# EAGLE board working (EAGLE 7.7.0)
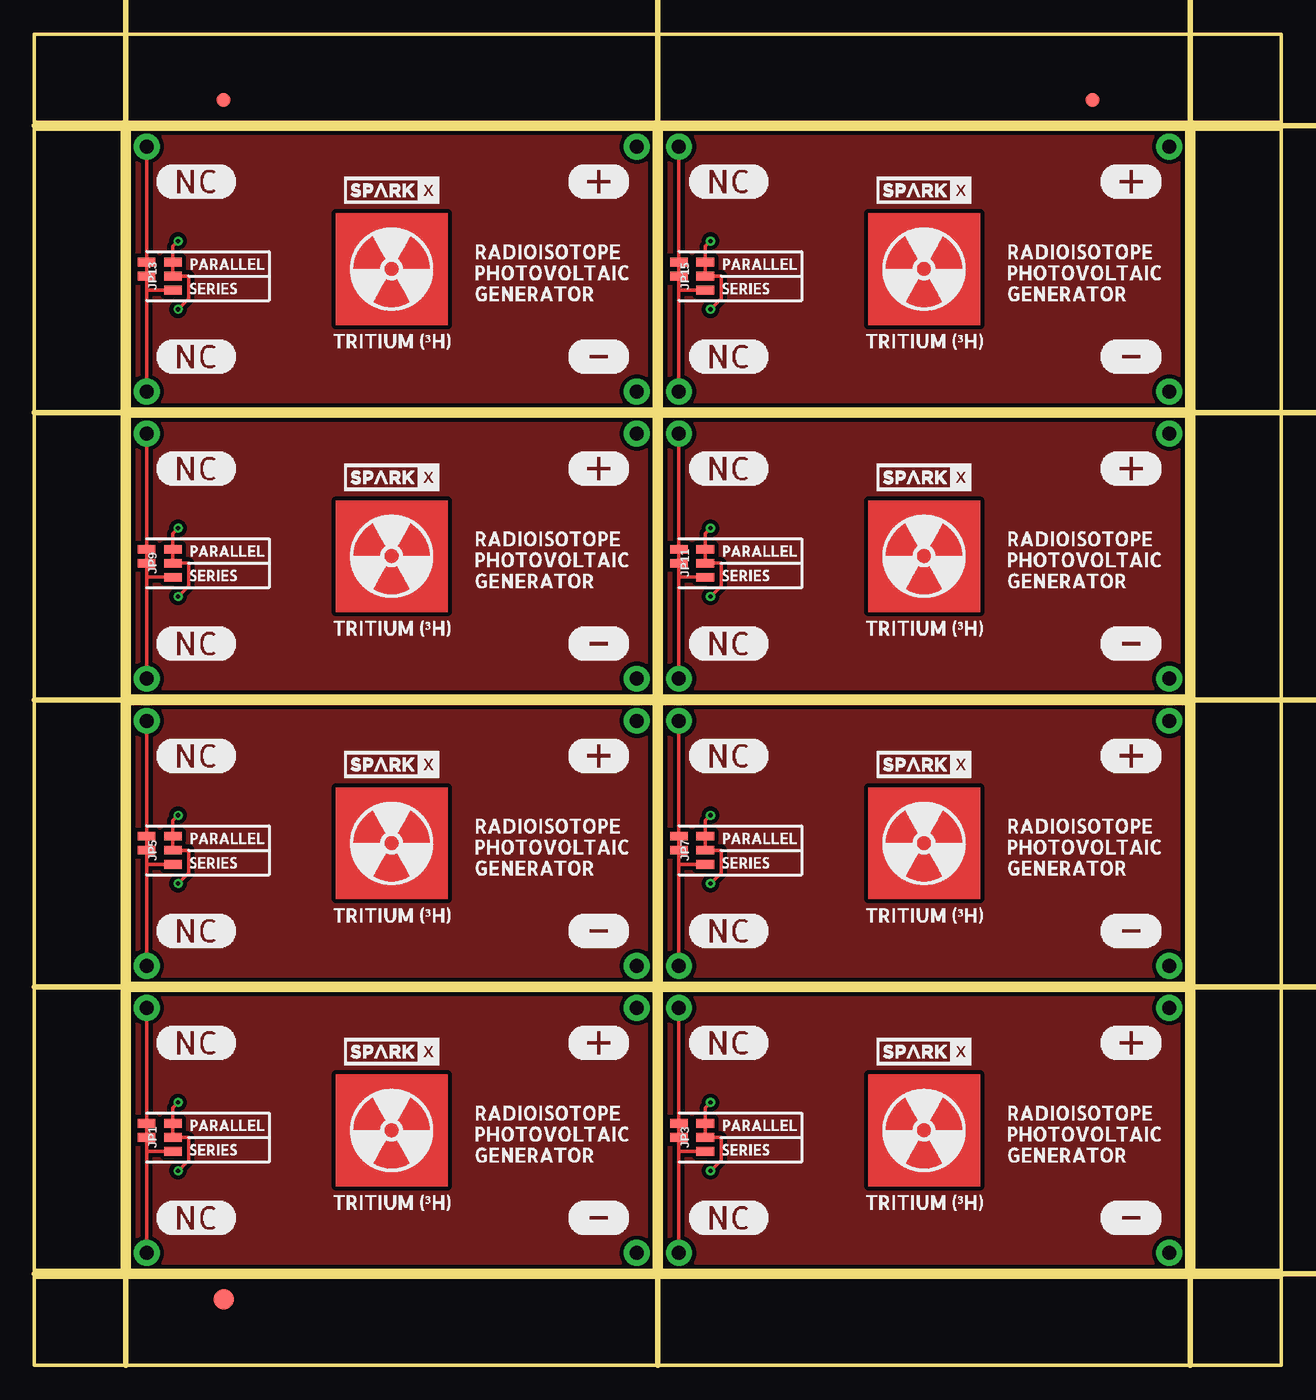
[diagram p0: board, top side]
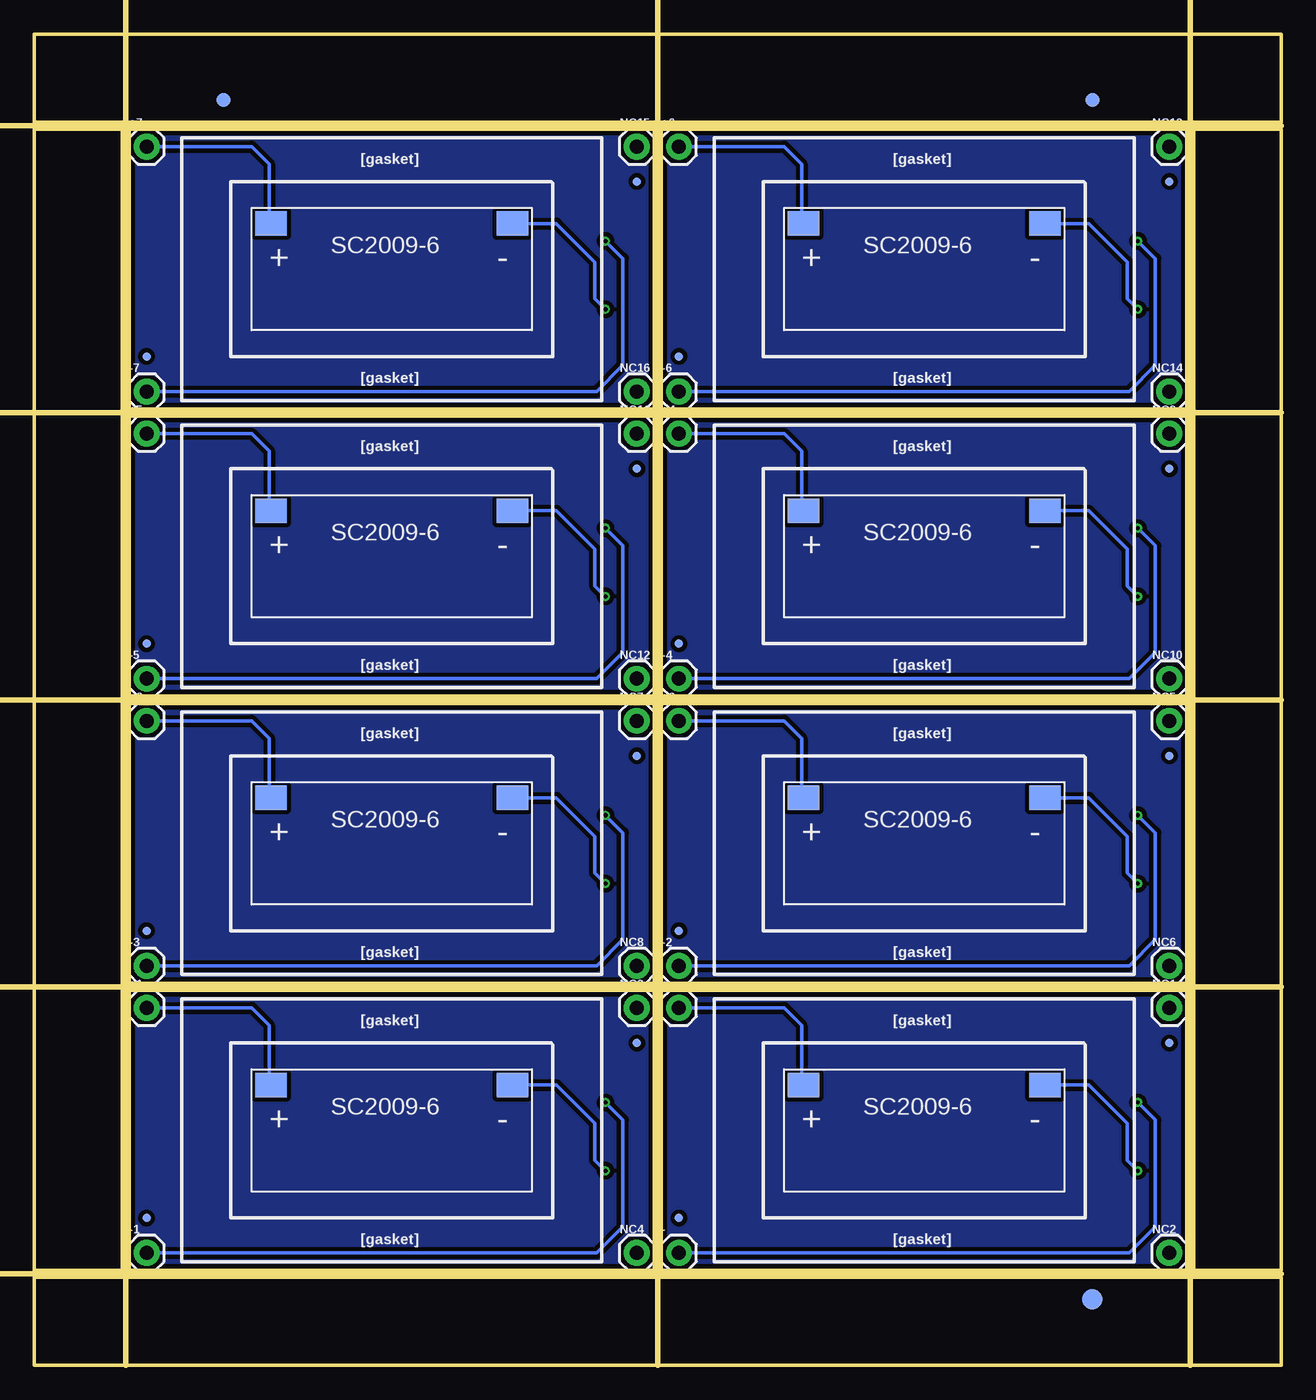
[diagram p1: board, bottom side, seen from below]

Size 90.42 x 96.52 mm. Coordinates in mm from the lower left corner, seen from the top.
Outline: 44.96,27.18 6.86,27.18 6.86,6.86 44.96,6.86 44.96,27.18
Outline: 83.57,27.18 45.47,27.18 45.47,6.86 83.57,6.86 83.57,27.18
Outline: 44.96,48.01 6.86,48.01 6.86,27.69 44.96,27.69 44.96,48.01
Outline: 83.57,48.01 45.47,48.01 45.47,27.69 83.57,27.69 83.57,48.01
Outline: 44.96,68.83 6.86,68.83 6.86,48.51 44.96,48.51 44.96,68.83
Outline: 83.57,68.83 45.47,68.83 45.47,48.51 83.57,48.51 83.57,68.83
Outline: 44.96,89.66 6.86,89.66 6.86,69.34 44.96,69.34 44.96,89.66
Outline: 83.57,89.66 45.47,89.66 45.47,69.34 83.57,69.34 83.57,89.66
Outline: 0,6.35 90.42,6.35 90.42,0 0,0 0,6.35
Outline: 84.07,89.66 90.42,89.66 90.42,6.86 84.07,6.86 84.07,89.66
Outline: 0,96.52 90.42,96.52 90.42,90.17 0,90.17 0,96.52
Outline: 0,89.66 6.35,89.66 6.35,6.86 0,6.86 0,89.66
Copper layers (1*16): Top 0.035mm / dielectric 1.5mm / Bottom 0.035mm
Design rules "SparkFun-2-layer-PCBWay-LIMIT": minimum track width 6mil, minimum drill 0.3mm, track to track 6mil, track to pad 6mil, pad to pad 6mil, via to via 6mil, smd to smd 6mil, copper to edge 6mil, drill to drill 6mil, minimum pad ring 7mil, minimum via ring 7mil, stop-mask expansion 4mil, vias tented up to drill 25mil, thermal gap 10mil
Milling: 8 lines

## Footprints (pad centres in the part's own frame; a part is rotated, then mirrored left to right if it is on the bottom)
1X01 = drill 1.016 pad 1.88: 1 0,0
FIDUCIAL-1X2 = smd 1 x 1: 1 0,0
FIDUCIAL-1.5X3 = smd 1.5 x 1.5: 1 0,0
FIDUCIAL-MICRO = smd 0.635 x 0.635: 1 0,0
SMT-JUMPER_3_1-NC_TRACE_NO-SILK = smd 0.635 x 1.27: 1 -1.016,0; 2 0,0; 3 1.016,0
SMT-JUMPER_2_NC_TRACE_NO-SILK = smd 0.635 x 1.27: 1 -0.508,0; 2 0.508,0
20X9MM = smd 2.286 x 1.778: + -8.763,3.302; - 8.763,3.302

## Placement (x,y rotation side)
+  [1X01]  43.69,25.91 0 bottom
+1  [1X01]  82.3,25.91 0 bottom
+2  [1X01]  43.69,46.74 0 bottom
+3  [1X01]  82.3,46.74 0 bottom
+4  [1X01]  43.69,67.56 0 bottom
+5  [1X01]  82.3,67.56 0 bottom
+6  [1X01]  43.69,88.39 0 bottom
+7  [1X01]  82.3,88.39 0 bottom
-  [1X01]  43.69,8.13 0 bottom
-1  [1X01]  82.3,8.13 0 bottom
-2  [1X01]  43.69,28.96 0 bottom
-3  [1X01]  82.3,28.96 0 bottom
-4  [1X01]  43.69,49.78 0 bottom
-5  [1X01]  82.3,49.78 0 bottom
-6  [1X01]  43.69,70.61 0 bottom
-7  [1X01]  82.3,70.61 0 bottom
E$1  [FIDUCIAL-1X2]  13.72,91.76 0 top
E$2  [FIDUCIAL-1X2]  13.72,91.76 0 bottom
E$3  [FIDUCIAL-1X2]  76.71,91.76 0 top
E$4  [FIDUCIAL-1X2]  76.71,91.76 0 bottom
E$5  [FIDUCIAL-1.5X3]  13.72,4.76 0 top
E$6  [FIDUCIAL-1.5X3]  13.72,4.76 0 bottom
FD1  FIDUCIALUFIDUCIAL  [FIDUCIAL-MICRO]  43.69,10.67 0 bottom
FD2  FIDUCIALUFIDUCIAL  [FIDUCIAL-MICRO]  8.13,23.37 0 bottom
FD3  FIDUCIALUFIDUCIAL  [FIDUCIAL-MICRO]  82.3,10.67 0 bottom
FD4  FIDUCIALUFIDUCIAL  [FIDUCIAL-MICRO]  46.74,23.37 0 bottom
FD5  FIDUCIALUFIDUCIAL  [FIDUCIAL-MICRO]  43.69,31.5 0 bottom
FD6  FIDUCIALUFIDUCIAL  [FIDUCIAL-MICRO]  8.13,44.2 0 bottom
FD7  FIDUCIALUFIDUCIAL  [FIDUCIAL-MICRO]  82.3,31.5 0 bottom
FD8  FIDUCIALUFIDUCIAL  [FIDUCIAL-MICRO]  46.74,44.2 0 bottom
FD9  FIDUCIALUFIDUCIAL  [FIDUCIAL-MICRO]  43.69,52.32 0 bottom
FD10  FIDUCIALUFIDUCIAL  [FIDUCIAL-MICRO]  8.13,65.02 0 bottom
FD11  FIDUCIALUFIDUCIAL  [FIDUCIAL-MICRO]  82.3,52.32 0 bottom
FD12  FIDUCIALUFIDUCIAL  [FIDUCIAL-MICRO]  46.74,65.02 0 bottom
FD13  FIDUCIALUFIDUCIAL  [FIDUCIAL-MICRO]  43.69,73.15 0 bottom
FD14  FIDUCIALUFIDUCIAL  [FIDUCIAL-MICRO]  8.13,85.85 0 bottom
FD15  FIDUCIALUFIDUCIAL  [FIDUCIAL-MICRO]  82.3,73.15 0 bottom
FD16  FIDUCIALUFIDUCIAL  [FIDUCIAL-MICRO]  46.74,85.85 0 bottom
JP1  JUMPER-SMT_3_1-NC_TRACE_NO-SILK  [SMT-JUMPER_3_1-NC_TRACE_NO-SILK]  10.03,16.51 90 top
JP2  JUMPER-SMT_2_NC_TRACE_NO-SILK  [SMT-JUMPER_2_NC_TRACE_NO-SILK]  8.13,17.02 90 top
JP3  JUMPER-SMT_3_1-NC_TRACE_NO-SILK  [SMT-JUMPER_3_1-NC_TRACE_NO-SILK]  48.64,16.51 90 top
JP4  JUMPER-SMT_2_NC_TRACE_NO-SILK  [SMT-JUMPER_2_NC_TRACE_NO-SILK]  46.74,17.02 90 top
JP5  JUMPER-SMT_3_1-NC_TRACE_NO-SILK  [SMT-JUMPER_3_1-NC_TRACE_NO-SILK]  10.03,37.34 90 top
JP6  JUMPER-SMT_2_NC_TRACE_NO-SILK  [SMT-JUMPER_2_NC_TRACE_NO-SILK]  8.13,37.85 90 top
JP7  JUMPER-SMT_3_1-NC_TRACE_NO-SILK  [SMT-JUMPER_3_1-NC_TRACE_NO-SILK]  48.64,37.34 90 top
JP8  JUMPER-SMT_2_NC_TRACE_NO-SILK  [SMT-JUMPER_2_NC_TRACE_NO-SILK]  46.74,37.85 90 top
JP9  JUMPER-SMT_3_1-NC_TRACE_NO-SILK  [SMT-JUMPER_3_1-NC_TRACE_NO-SILK]  10.03,58.17 90 top
JP10  JUMPER-SMT_2_NC_TRACE_NO-SILK  [SMT-JUMPER_2_NC_TRACE_NO-SILK]  8.13,58.67 90 top
JP11  JUMPER-SMT_3_1-NC_TRACE_NO-SILK  [SMT-JUMPER_3_1-NC_TRACE_NO-SILK]  48.64,58.17 90 top
JP12  JUMPER-SMT_2_NC_TRACE_NO-SILK  [SMT-JUMPER_2_NC_TRACE_NO-SILK]  46.74,58.67 90 top
JP13  JUMPER-SMT_3_1-NC_TRACE_NO-SILK  [SMT-JUMPER_3_1-NC_TRACE_NO-SILK]  10.03,78.99 90 top
JP14  JUMPER-SMT_2_NC_TRACE_NO-SILK  [SMT-JUMPER_2_NC_TRACE_NO-SILK]  8.13,79.5 90 top
JP15  JUMPER-SMT_3_1-NC_TRACE_NO-SILK  [SMT-JUMPER_3_1-NC_TRACE_NO-SILK]  48.64,78.99 90 top
JP16  JUMPER-SMT_2_NC_TRACE_NO-SILK  [SMT-JUMPER_2_NC_TRACE_NO-SILK]  46.74,79.5 90 top
NC1  [1X01]  8.13,25.91 0 bottom
NC2  [1X01]  8.13,8.13 0 bottom
NC3  [1X01]  46.74,25.91 0 bottom
NC4  [1X01]  46.74,8.13 0 bottom
NC5  [1X01]  8.13,46.74 0 bottom
NC6  [1X01]  8.13,28.96 0 bottom
NC7  [1X01]  46.74,46.74 0 bottom
NC8  [1X01]  46.74,28.96 0 bottom
NC9  [1X01]  8.13,67.56 0 bottom
NC10  [1X01]  8.13,49.78 0 bottom
NC11  [1X01]  46.74,67.56 0 bottom
NC12  [1X01]  46.74,49.78 0 bottom
NC13  [1X01]  8.13,88.39 0 bottom
NC14  [1X01]  8.13,70.61 0 bottom
NC15  [1X01]  46.74,88.39 0 bottom
NC16  [1X01]  46.74,70.61 0 bottom
U$1  9X20_AMORPHOUS_PV  [20X9MM]  25.91,17.02 0 bottom
U$2  [RADIATION_TREFOIL_SIGN_SYMBOL_WARNING_SIGN_SYMBOL_CLASSIC_ROUND_STICKER#RCB13028D4AAD443CA303E61808FDC84C_V9WAF_8BYVR_540#JPG]  25.91,17.02 0 top
U$3  [TRITIUM_##H#0]  20.7,11.81 0 top
U$4  [SPARKX-SMALL]  25.91,22.73 0 top
U$5  [RADIOISOTOPE0]  30.99,18.29 0 top
U$6  [PHOTOVOLTAIC1]  30.99,16.76 0 top
U$7  [PARALLEL1]  10.54,17.4 0 top
U$8  [SERIES0]  10.54,15.62 0 top
U$9  [#0]  38.61,23.37 0 top
U$10  [#1]  38.61,10.67 0 top
U$11  [NC0]  8.76,23.37 0 top
U$12  [NC0]  8.76,10.67 0 top
U$13  [GENERATOR0]  30.99,15.24 0 top
U$14  9X20_AMORPHOUS_PV  [20X9MM]  64.52,17.02 0 bottom
U$15  [RADIATION_TREFOIL_SIGN_SYMBOL_WARNING_SIGN_SYMBOL_CLASSIC_ROUND_STICKER#RCB13028D4AAD443CA303E61808FDC84C_V9WAF_8BYVR_540#JPG]  64.52,17.02 0 top
U$16  [TRITIUM_##H#0]  59.31,11.81 0 top
U$17  [SPARKX-SMALL]  64.52,22.73 0 top
U$18  [PARALLEL1]  49.15,17.4 0 top
U$19  [SERIES0]  49.15,15.62 0 top
U$20  [#0]  77.22,23.37 0 top
U$21  [#1]  77.22,10.67 0 top
U$22  [NC0]  47.37,23.37 0 top
U$23  [NC0]  47.37,10.67 0 top
U$24  [RADIOISOTOPE0]  69.6,18.29 0 top
U$25  [PHOTOVOLTAIC1]  69.6,16.76 0 top
U$26  [GENERATOR0]  69.6,15.24 0 top
U$27  9X20_AMORPHOUS_PV  [20X9MM]  25.91,37.85 0 bottom
U$28  [RADIATION_TREFOIL_SIGN_SYMBOL_WARNING_SIGN_SYMBOL_CLASSIC_ROUND_STICKER#RCB13028D4AAD443CA303E61808FDC84C_V9WAF_8BYVR_540#JPG]  25.91,37.85 0 top
U$29  [TRITIUM_##H#0]  20.7,32.64 0 top
U$30  [SPARKX-SMALL]  25.91,43.56 0 top
U$31  [PARALLEL1]  10.54,38.23 0 top
U$32  [SERIES0]  10.54,36.45 0 top
U$33  [#0]  38.61,44.2 0 top
U$34  [#1]  38.61,31.5 0 top
U$35  [NC0]  8.76,44.2 0 top
U$36  [NC0]  8.76,31.5 0 top
U$37  [RADIOISOTOPE0]  30.99,39.12 0 top
U$38  [PHOTOVOLTAIC1]  30.99,37.59 0 top
U$39  [GENERATOR0]  30.99,36.07 0 top
U$40  9X20_AMORPHOUS_PV  [20X9MM]  64.52,37.85 0 bottom
U$41  [RADIATION_TREFOIL_SIGN_SYMBOL_WARNING_SIGN_SYMBOL_CLASSIC_ROUND_STICKER#RCB13028D4AAD443CA303E61808FDC84C_V9WAF_8BYVR_540#JPG]  64.52,37.85 0 top
U$42  [TRITIUM_##H#0]  59.31,32.64 0 top
U$43  [SPARKX-SMALL]  64.52,43.56 0 top
U$44  [PARALLEL1]  49.15,38.23 0 top
U$45  [SERIES0]  49.15,36.45 0 top
U$46  [#0]  77.22,44.2 0 top
U$47  [#1]  77.22,31.5 0 top
U$48  [NC0]  47.37,44.2 0 top
U$49  [NC0]  47.37,31.5 0 top
U$50  [RADIOISOTOPE0]  69.6,39.12 0 top
U$51  [PHOTOVOLTAIC1]  69.6,37.59 0 top
U$52  [GENERATOR0]  69.6,36.07 0 top
U$53  9X20_AMORPHOUS_PV  [20X9MM]  25.91,58.67 0 bottom
U$54  [RADIATION_TREFOIL_SIGN_SYMBOL_WARNING_SIGN_SYMBOL_CLASSIC_ROUND_STICKER#RCB13028D4AAD443CA303E61808FDC84C_V9WAF_8BYVR_540#JPG]  25.91,58.67 0 top
U$55  [TRITIUM_##H#0]  20.7,53.47 0 top
U$56  [SPARKX-SMALL]  25.91,64.39 0 top
U$57  [PARALLEL1]  10.54,59.05 0 top
U$58  [SERIES0]  10.54,57.28 0 top
U$59  [#0]  38.61,65.02 0 top
U$60  [#1]  38.61,52.32 0 top
U$61  [NC0]  8.76,65.02 0 top
U$62  [NC0]  8.76,52.32 0 top
U$63  [RADIOISOTOPE0]  30.99,59.94 0 top
U$64  [PHOTOVOLTAIC1]  30.99,58.42 0 top
U$65  [GENERATOR0]  30.99,56.9 0 top
U$66  9X20_AMORPHOUS_PV  [20X9MM]  64.52,58.67 0 bottom
U$67  [RADIATION_TREFOIL_SIGN_SYMBOL_WARNING_SIGN_SYMBOL_CLASSIC_ROUND_STICKER#RCB13028D4AAD443CA303E61808FDC84C_V9WAF_8BYVR_540#JPG]  64.52,58.67 0 top
U$68  [TRITIUM_##H#0]  59.31,53.47 0 top
U$69  [SPARKX-SMALL]  64.52,64.39 0 top
U$70  [PARALLEL1]  49.15,59.05 0 top
U$71  [SERIES0]  49.15,57.28 0 top
U$72  [#0]  77.22,65.02 0 top
U$73  [#1]  77.22,52.32 0 top
U$74  [NC0]  47.37,65.02 0 top
U$75  [NC0]  47.37,52.32 0 top
U$76  [RADIOISOTOPE0]  69.6,59.94 0 top
U$77  [PHOTOVOLTAIC1]  69.6,58.42 0 top
U$78  [GENERATOR0]  69.6,56.9 0 top
U$79  9X20_AMORPHOUS_PV  [20X9MM]  25.91,79.5 0 bottom
U$80  [RADIATION_TREFOIL_SIGN_SYMBOL_WARNING_SIGN_SYMBOL_CLASSIC_ROUND_STICKER#RCB13028D4AAD443CA303E61808FDC84C_V9WAF_8BYVR_540#JPG]  25.91,79.5 0 top
U$81  [TRITIUM_##H#0]  20.7,74.3 0 top
U$82  [SPARKX-SMALL]  25.91,85.22 0 top
U$83  [PARALLEL1]  10.54,79.88 0 top
U$84  [SERIES0]  10.54,78.11 0 top
U$85  [#0]  38.61,85.85 0 top
U$86  [#1]  38.61,73.15 0 top
U$87  [NC0]  8.76,85.85 0 top
U$88  [NC0]  8.76,73.15 0 top
U$89  [RADIOISOTOPE0]  30.99,80.77 0 top
U$90  [PHOTOVOLTAIC1]  30.99,79.25 0 top
U$91  [GENERATOR0]  30.99,77.72 0 top
U$92  9X20_AMORPHOUS_PV  [20X9MM]  64.52,79.5 0 bottom
U$93  [RADIATION_TREFOIL_SIGN_SYMBOL_WARNING_SIGN_SYMBOL_CLASSIC_ROUND_STICKER#RCB13028D4AAD443CA303E61808FDC84C_V9WAF_8BYVR_540#JPG]  64.52,79.5 0 top
U$94  [TRITIUM_##H#0]  59.31,74.3 0 top
U$95  [SPARKX-SMALL]  64.52,85.22 0 top
U$96  [PARALLEL1]  49.15,79.88 0 top
U$97  [SERIES0]  49.15,78.11 0 top
U$98  [#0]  77.22,85.85 0 top
U$99  [#1]  77.22,73.15 0 top
U$100  [NC0]  47.37,85.85 0 top
U$101  [NC0]  47.37,73.15 0 top
U$102  [RADIOISOTOPE0]  69.6,80.77 0 top
U$103  [PHOTOVOLTAIC1]  69.6,79.25 0 top
U$104  [GENERATOR0]  69.6,77.72 0 top

## Library data of the parts
+ +1-+7 - -1--7 NC1-NC16 = SparkFun-Connectors
E$1-E$4 FD1-FD16 = SparkFun-Aesthetics
E$5 E$6 = SparkFun-Retired
JP1-JP16 = SparkFun-Jumpers
U$1 U$4 U$14 U$17 U$27 U$30 U$40 U$43 U$53 U$56 U$66 U$69 U$79 U$82 U$92 U$95 = SparkX
U$2 U$15 U$28 U$41 U$54 U$67 U$80 U$93 = radiation_trefoil_sign_symbol_warning_sign_symbol_classic_round_sticker#rcb13028d4aad443ca303e61808fdc84c_v9waf_8byvr_540#jpg (2)
U$3 U$16 U$29 U$42 U$55 U$68 U$81 U$94 = buzzard_labels (2)
U$5 U$6 U$24 U$25 U$37 U$38 U$50 U$51 U$63 U$64 U$76 U$77 U$89 U$90 U$102 U$103 = buzzard_labels (3)
U$7 U$8 U$18 U$19 U$31 U$32 U$44 U$45 U$57 U$58 U$70 U$71 U$83 U$84 U$96 U$97 = buzzard_labels (6)
U$9 U$10 U$20 U$21 U$33 U$34 U$46 U$47 U$59 U$60 U$72 U$73 U$85 U$86 U$98 U$99 = buzzard_labels (9)
U$11 U$12 U$22 U$23 U$35 U$36 U$48 U$49 U$61 U$62 U$74 U$75 U$87 U$88 U$100 U$101 = buzzard_labels (11)
U$13 U$26 U$39 U$52 U$65 U$78 U$91 U$104 = buzzard_labels (12)

## Nets
N$1: +.1 U$1.+
N$2: JP1.2 U$1.-
N$3: -.1 JP1.3
N$4: JP1.1 JP2.1 NC2.1
N$5: JP2.2 NC1.1
N$8: +1.1 U$14.+
N$9: -1.1 JP3.3
N$10: JP3.1 JP4.1 NC4.1
N$11: JP4.2 NC3.1
N$12: JP3.2 U$14.-
N$15: +2.1 U$27.+
N$16: -2.1 JP5.3
N$17: JP5.1 JP6.1 NC6.1
N$18: JP6.2 NC5.1
N$19: JP5.2 U$27.-
N$22: +3.1 U$40.+
N$23: -3.1 JP7.3
N$24: JP7.1 JP8.1 NC8.1
N$25: JP8.2 NC7.1
N$26: JP7.2 U$40.-
N$29: +4.1 U$53.+
N$30: -4.1 JP9.3
N$31: JP9.1 JP10.1 NC10.1
N$32: JP10.2 NC9.1
N$33: JP9.2 U$53.-
N$36: +5.1 U$66.+
N$37: -5.1 JP11.3
N$38: JP11.1 JP12.1 NC12.1
N$39: JP12.2 NC11.1
N$40: JP11.2 U$66.-
N$43: +6.1 U$79.+
N$44: -6.1 JP13.3
N$45: JP13.1 JP14.1 NC14.1
N$46: JP14.2 NC13.1
N$47: JP13.2 U$79.-
N$50: +7.1 U$92.+
N$51: -7.1 JP15.3
N$52: JP15.1 JP16.1 NC16.1
N$53: JP16.2 NC15.1
N$54: JP15.2 U$92.-

## Tracks (layer width: path | path; a pad name or v marks a point on that pad's centre or on a via)
N$1
  Bottom 0.254: +.1 36.07,25.91 34.8,24.64 34.8,20.45 U$1.+
N$2  (via drill 0.3)
  Top 0.254: v10.41,14.1 11.18,14.86 11.18,16.51 JP1.2
  Bottom 0.254: U$1.- 13.97,20.32 11.18,17.53 11.18,14.86 v10.41,14.1
N$3  (via drill 0.3)
  Top 0.254: v10.41,19.05 10.03,18.67 JP1.3
  Bottom 0.254: -.1 11.05,8.13 9.14,10.03 9.14,17.78 v10.41,19.05
N$4
  Top 0.254: NC2.1 8.13,15.49 | 8.13,15.49 JP2.1 | JP1.1 8.13,15.49
N$5
  Top 0.254: NC1.1 JP2.2
N$6
  pour Bottom (isolate 0.305): 44.96,27.18 6.86,27.18 6.86,6.86 44.96,6.86
N$7
  pour Top (isolate 0.305): 44.96,27.18 6.86,27.18 6.86,6.86 44.96,6.86
N$8
  Bottom 0.254: +1.1 74.68,25.91 73.41,24.64 73.41,20.45 U$14.+
N$9  (via drill 0.3)
  Top 0.254: v49.02,19.05 48.64,18.67 JP3.3
  Bottom 0.254: -1.1 49.66,8.13 47.75,10.03 47.75,17.78 v49.02,19.05
N$10
  Top 0.254: NC4.1 46.74,15.49 | 46.74,15.49 JP4.1 | JP3.1 46.74,15.49
N$11
  Top 0.254: NC3.1 JP4.2
N$12  (via drill 0.3)
  Top 0.254: v49.02,14.1 49.78,14.86 49.78,16.51 JP3.2
  Bottom 0.254: U$14.- 52.58,20.32 49.78,17.53 49.78,14.86 v49.02,14.1
N$13
  pour Bottom (isolate 0.305): 83.57,27.18 45.47,27.18 45.47,6.86 83.57,6.86
N$14
  pour Top (isolate 0.305): 83.57,27.18 45.47,27.18 45.47,6.86 83.57,6.86
N$15
  Bottom 0.254: +2.1 36.07,46.74 34.8,45.47 34.8,41.27 U$27.+
N$16  (via drill 0.3)
  Top 0.254: v10.41,39.88 10.03,39.5 JP5.3
  Bottom 0.254: -2.1 11.05,28.96 9.14,30.86 9.14,38.61 v10.41,39.88
N$17
  Top 0.254: NC6.1 8.13,36.32 | 8.13,36.32 JP6.1 | JP5.1 8.13,36.32
N$18
  Top 0.254: NC5.1 JP6.2
N$19  (via drill 0.3)
  Top 0.254: v10.41,34.92 11.18,35.69 11.18,37.34 JP5.2
  Bottom 0.254: U$27.- 13.97,41.15 11.18,38.35 11.18,35.69 v10.41,34.92
N$20
  pour Bottom (isolate 0.305): 44.96,48.01 6.86,48.01 6.86,27.69 44.96,27.69
N$21
  pour Top (isolate 0.305): 44.96,48.01 6.86,48.01 6.86,27.69 44.96,27.69
N$22
  Bottom 0.254: +3.1 74.68,46.74 73.41,45.47 73.41,41.27 U$40.+
N$23  (via drill 0.3)
  Top 0.254: v49.02,39.88 48.64,39.5 JP7.3
  Bottom 0.254: -3.1 49.66,28.96 47.75,30.86 47.75,38.61 v49.02,39.88
N$24
  Top 0.254: NC8.1 46.74,36.32 | 46.74,36.32 JP8.1 | JP7.1 46.74,36.32
N$25
  Top 0.254: NC7.1 JP8.2
N$26  (via drill 0.3)
  Top 0.254: v49.02,34.92 49.78,35.69 49.78,37.34 JP7.2
  Bottom 0.254: U$40.- 52.58,41.15 49.78,38.35 49.78,35.69 v49.02,34.92
N$27
  pour Bottom (isolate 0.305): 83.57,48.01 45.47,48.01 45.47,27.69 83.57,27.69
N$28
  pour Top (isolate 0.305): 83.57,48.01 45.47,48.01 45.47,27.69 83.57,27.69
N$29
  Bottom 0.254: +4.1 36.07,67.56 34.8,66.29 34.8,62.1 U$53.+
N$30  (via drill 0.3)
  Top 0.254: v10.41,60.71 10.03,60.32 JP9.3
  Bottom 0.254: -4.1 11.05,49.78 9.14,51.69 9.14,59.44 v10.41,60.71
N$31
  Top 0.254: NC10.1 8.13,57.15 | 8.13,57.15 JP10.1 | JP9.1 8.13,57.15
N$32
  Top 0.254: NC9.1 JP10.2
N$33  (via drill 0.3)
  Top 0.254: v10.41,55.75 11.18,56.51 11.18,58.17 JP9.2
  Bottom 0.254: U$53.- 13.97,61.98 11.18,59.18 11.18,56.51 v10.41,55.75
N$34
  pour Bottom (isolate 0.305): 44.96,68.83 6.86,68.83 6.86,48.51 44.96,48.51
N$35
  pour Top (isolate 0.305): 44.96,68.83 6.86,68.83 6.86,48.51 44.96,48.51
N$36
  Bottom 0.254: +5.1 74.68,67.56 73.41,66.29 73.41,62.1 U$66.+
N$37  (via drill 0.3)
  Top 0.254: v49.02,60.71 48.64,60.32 JP11.3
  Bottom 0.254: -5.1 49.66,49.78 47.75,51.69 47.75,59.44 v49.02,60.71
N$38
  Top 0.254: NC12.1 46.74,57.15 | 46.74,57.15 JP12.1 | JP11.1 46.74,57.15
N$39
  Top 0.254: NC11.1 JP12.2
N$40  (via drill 0.3)
  Top 0.254: v49.02,55.75 49.78,56.51 49.78,58.17 JP11.2
  Bottom 0.254: U$66.- 52.58,61.98 49.78,59.18 49.78,56.51 v49.02,55.75
N$41
  pour Bottom (isolate 0.305): 83.57,68.83 45.47,68.83 45.47,48.51 83.57,48.51
N$42
  pour Top (isolate 0.305): 83.57,68.83 45.47,68.83 45.47,48.51 83.57,48.51
N$43
  Bottom 0.254: +6.1 36.07,88.39 34.8,87.12 34.8,82.93 U$79.+
N$44  (via drill 0.3)
  Top 0.254: v10.41,81.53 10.03,81.15 JP13.3
  Bottom 0.254: -6.1 11.05,70.61 9.14,72.52 9.14,80.26 v10.41,81.53
N$45
  Top 0.254: NC14.1 8.13,77.98 | 8.13,77.98 JP14.1 | JP13.1 8.13,77.98
N$46
  Top 0.254: NC13.1 JP14.2
N$47  (via drill 0.3)
  Top 0.254: v10.41,76.58 11.18,77.34 11.18,78.99 JP13.2
  Bottom 0.254: U$79.- 13.97,82.8 11.18,80.01 11.18,77.34 v10.41,76.58
N$48
  pour Bottom (isolate 0.305): 44.96,89.66 6.86,89.66 6.86,69.34 44.96,69.34
N$49
  pour Top (isolate 0.305): 44.96,89.66 6.86,89.66 6.86,69.34 44.96,69.34
N$50
  Bottom 0.254: +7.1 74.68,88.39 73.41,87.12 73.41,82.93 U$92.+
N$51  (via drill 0.3)
  Top 0.254: v49.02,81.53 48.64,81.15 JP15.3
  Bottom 0.254: -7.1 49.66,70.61 47.75,72.52 47.75,80.26 v49.02,81.53
N$52
  Top 0.254: NC16.1 46.74,77.98 | 46.74,77.98 JP16.1 | JP15.1 46.74,77.98
N$53
  Top 0.254: NC15.1 JP16.2
N$54  (via drill 0.3)
  Top 0.254: v49.02,76.58 49.78,77.34 49.78,78.99 JP15.2
  Bottom 0.254: U$92.- 52.58,82.8 49.78,80.01 49.78,77.34 v49.02,76.58
N$55
  pour Bottom (isolate 0.305): 83.57,89.66 45.47,89.66 45.47,69.34 83.57,69.34
N$56
  pour Top (isolate 0.305): 83.57,89.66 45.47,89.66 45.47,69.34 83.57,69.34

## Text on the board
bPlace: [gasket] | [gasket] | [gasket] | [gasket] | [gasket] | [gasket] | [gasket] | [gasket] | [gasket] | [gasket] | [gasket] | [gasket] | [gasket] | [gasket] | [gasket] | [gasket]
Milling: v-score | v-score | v-score | v-score | v-score | v-score | v-score | v-score